# Altium PCB GSMPart.PcbDoc
Units mil, origin at the board's own origin, x right, y up, seen from the top; angles counter-clockwise.
Board outline 6000 x 4000 mil, 2 copper layers (Top Layer, Bottom Layer); 22 components, 17 nets, 114 pads, 0 vias.
Unrouted connection lines stored in the file: 43.
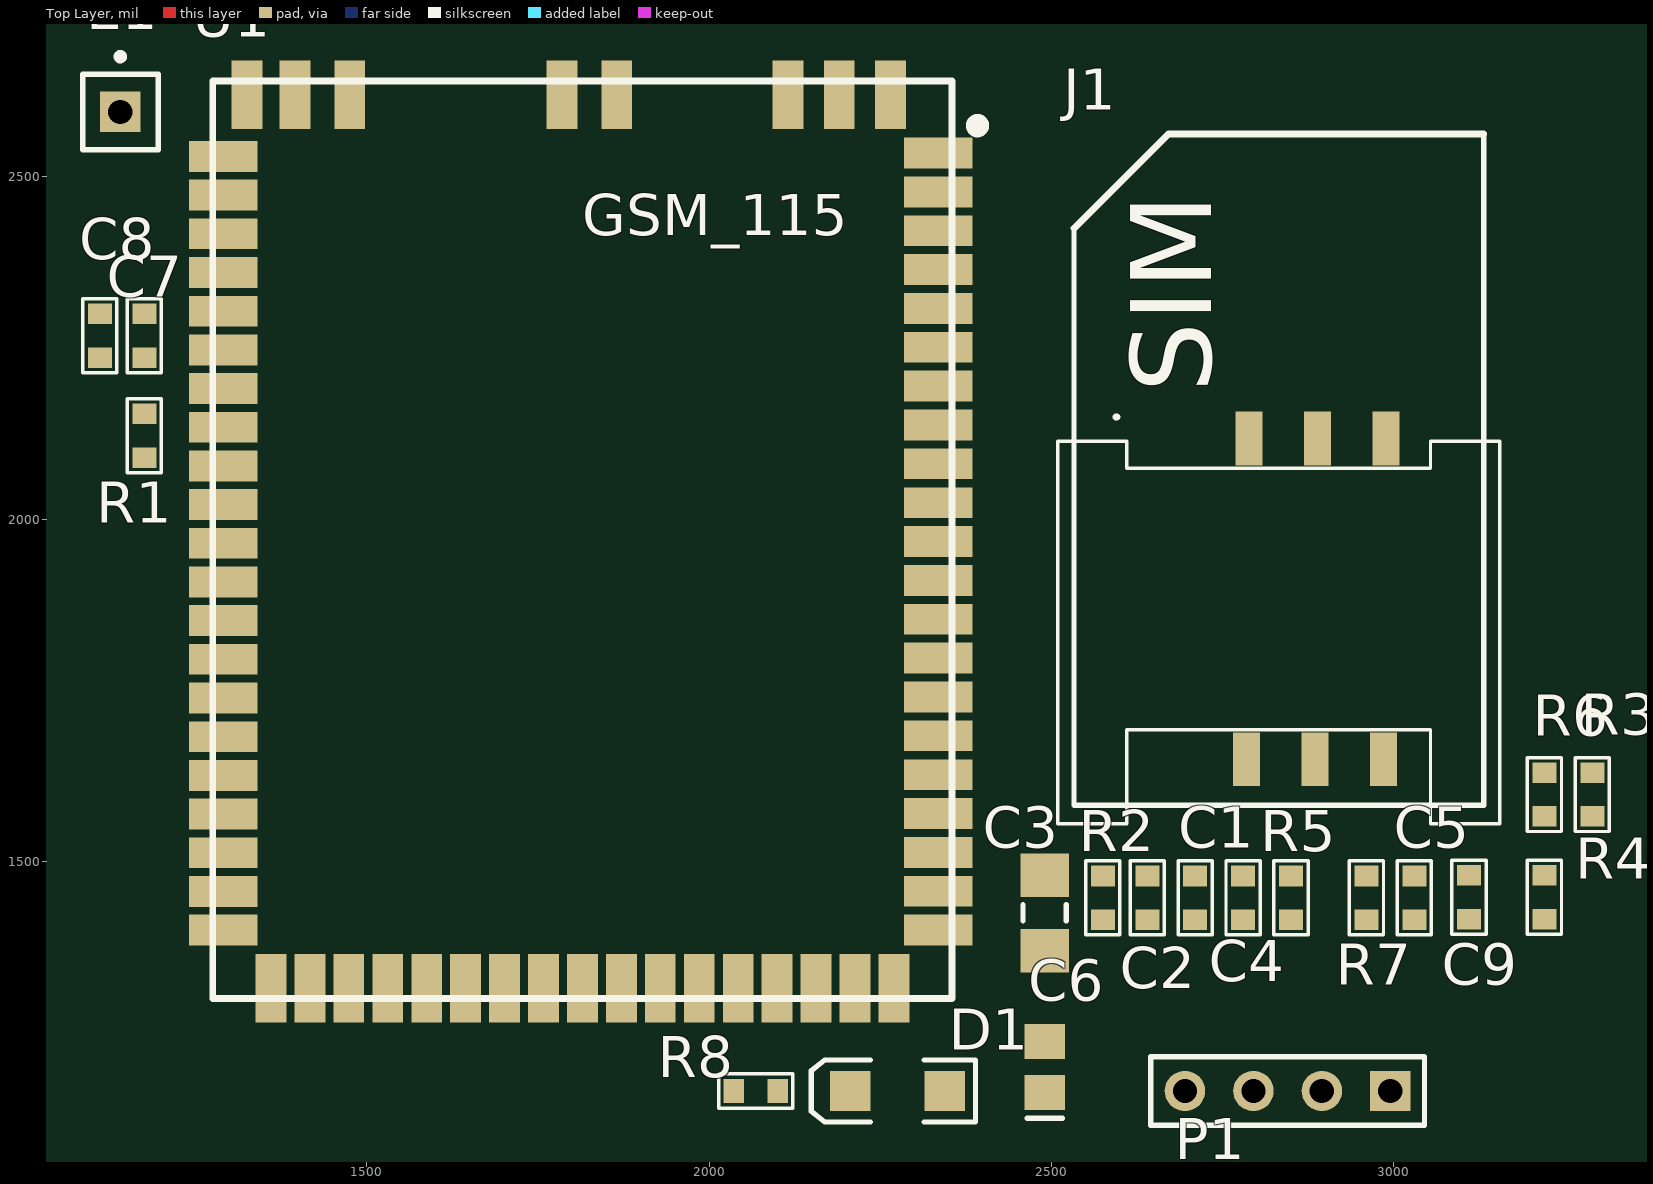
[diagram p0: Top Layer view]
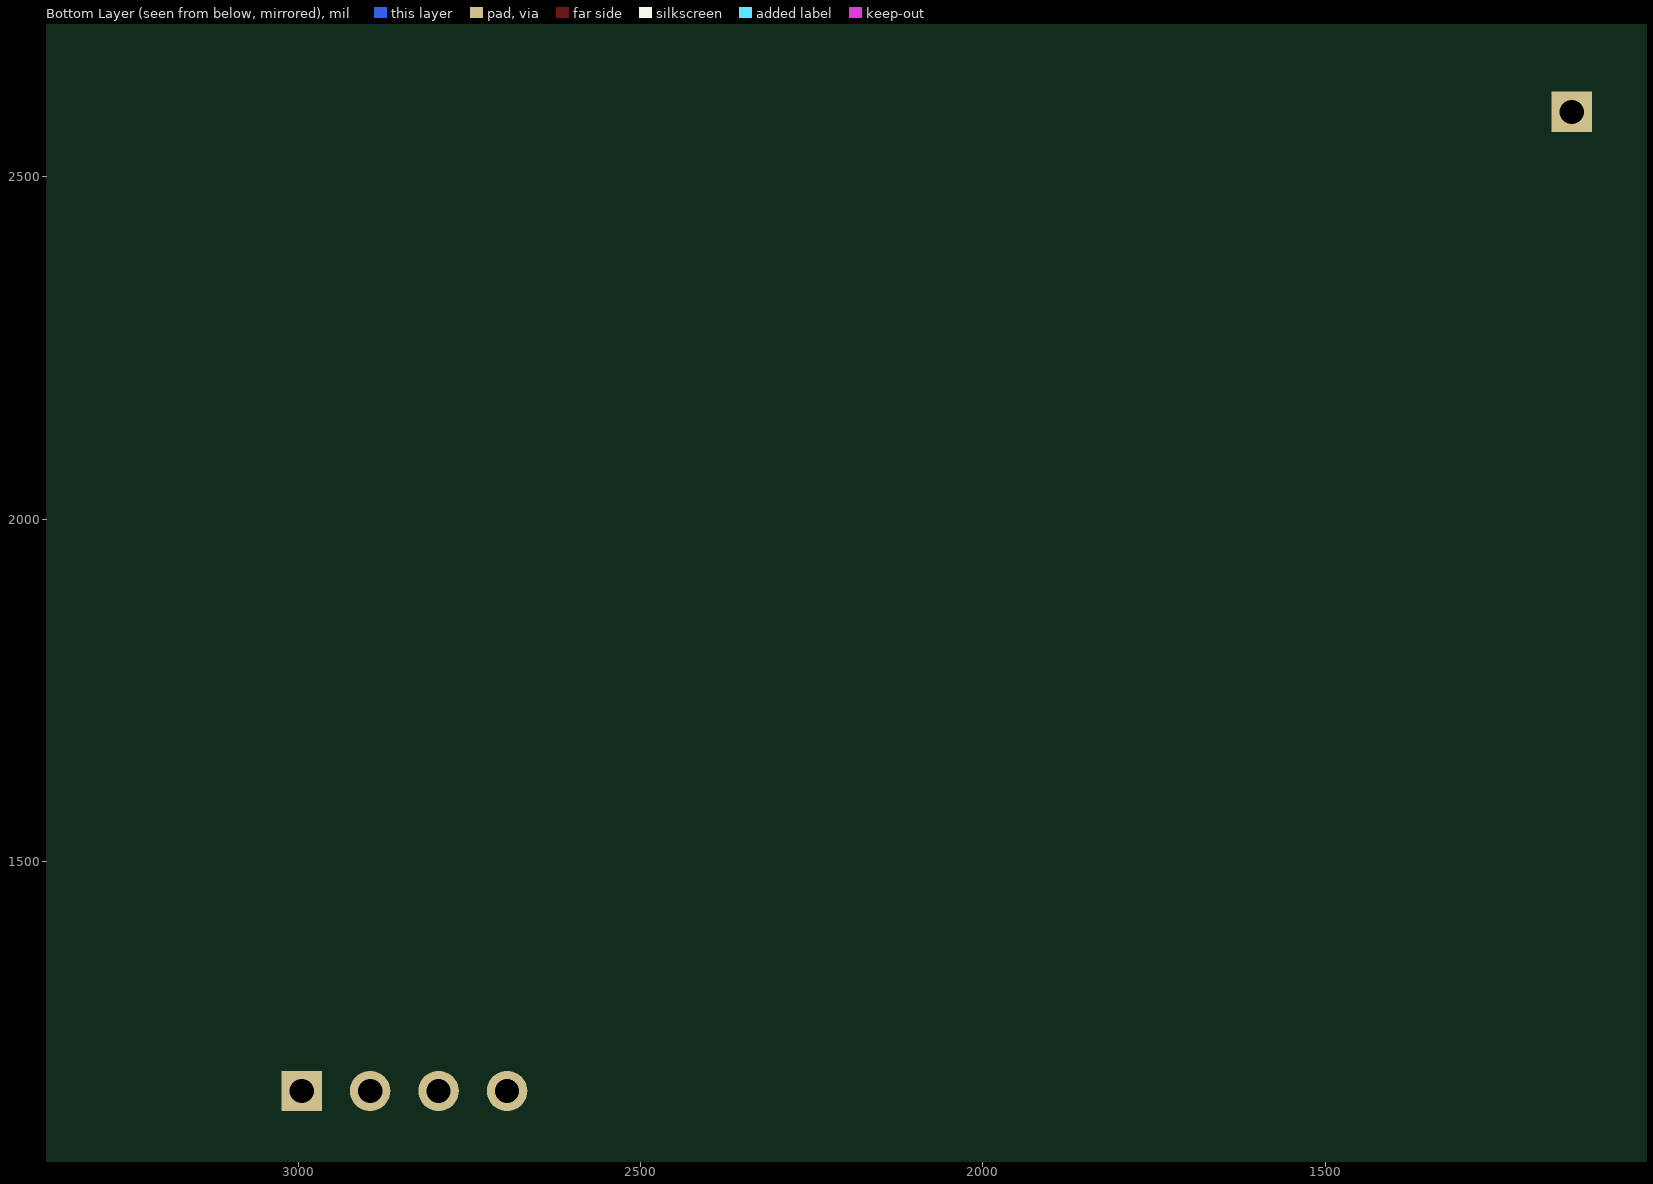
[diagram p1: Bottom Layer view, seen from below]

## Layer stack, top to bottom
Top Layer: signal copper 1.4
Dielectric: dielectric 12.6, FR-4, Dk 4.8
Bottom Layer: signal copper 1.4

## Board outline
1000,1000 7000,1000 7000,5000 1000,5000

## Design rules (kind name [scope] priority, off if disabled: settings)
Clearance [All] p1: gap=10
ComponentClearance [All] p1: gap=10 collisioncheckmode=3 verticalgap=10
PolygonConnect [All] p1: connectstyle=Relief reliefconductorwidth=10 reliefentries=4 polygonreliefangle="90 Angle"
RoutingVias [All] p1: holewidth=28 width=50 viastyle="Through Hole" minholewidth=28 minwidth=50 maxholewidth=28 maxwidth=50
SolderMaskExpansion [All] p1: expansion=4
TestPointUsage [All] p1: valid=0 allowmultiple=FALSE
Testpoint [All] p1: side=15 testpointundercomponent=TRUE minsize=40 maxsize=100 preferedsize=60 minholesize=0 maxholesize=40 preferedholesize=32 testpointgrid=1 style=1023 order=0123456789
Width [All] p1: maxlimit=10 minlimit=10 preferedwidth=10
18 further rules are at their usual default settings.

## Components (designator, comment, footprint, x,y, rotation, side; value= is the part's Value field where it differs from the comment)
C1 "Cap" 1608(0603) 2710,1415 r90 top
C2 "Cap" 1608(0603) 2640,1415 r90 top
C3 "Cap" 3216[1206] 2490,1425 r90 top
C4 "Cap" 1608(0603) 2780,1415 r90 top
C5 "Cap" 1608(0603) 3030,1415 r90 top
C6 "Cap Pol3" C0805 2490,1200 r90 top
C7 "Cap" 1608(0603) 1175,2300 r270 top
C8 "Cap" 1608(0603) 1110,2300 r270 top
C9 "Cap" 1608(0603) 3110,1480 r270 top
D1 "Red LED" 3.2X1.6X1.1 2275,1165 r180 top
E1 "Antenna" PIN1 1140,2595 r0 top
J1 "SIMCard" PCB_SIM 3155,1555 r90 top
P1 "RS232" HDR1X4 2995,1165 r180 top
R1 "Res2" 1608(0603) 1175,2090 r90 top
R2 "Res2" 1608(0603) 2575,1415 r90 top
R3 "Res2" 1608(0603) 3290,1630 r270 top
R4 "Res2" 1608(0603) 3220,1480 r270 top
R5 "Res2" 1608(0603) 2850,1415 r90 top
R6 "Res2" 1608(0603) 3220,1630 r270 top
R7 "Res2" 1608(0603) 2960,1415 r90 top
R8 "Res2" 1608(0603) 2100,1165 r180 top
U1 "GSM_115" PCB_GSM_115 2355,2640 r0 top

## Footprints (in the part's own frame and the unit in brackets; to place one, negate y for a bottom-side part, rotate by r counter-clockwise, add the part's x,y. Pads: shape width x height; smd on the part's side, far side on the other; paste and mask are expansions set on the pad)
3.2X1.6X1.1 [mm] "SMT LED; 2 Flat Leads"
  rect 1.5x1.5 smd: 1(-1.75,0) 2(1.75,0)
  silkscreen extent -2.9,-1.15 3.2,1.15
1608(0603) [mil]
  rect 30x35 smd: 1(0,0) 2(64,0)
  silkscreen extent -22,-25 86,25
3216[1206] [mm] "Chip Resistor; Body 3.2 x 1.6 mm (LxW typ)"
  rect 1.6x1.8 smd: 1(-1.4,0) 2(1.4,0)
  silkscreen extent -0.3,-0.8 0.3,0.8
C0805 [mm] "Chip Capacitor; Body 2.0 x 1.2 mm (LxW typ)"
  rect 1.3x1.5 smd: 1(-0.95,0) 2(0.95,0)
  silkscreen extent -1.9,-0.65 -1.9,0.65
HDR1X4 [mm] "Connector; Header; 4 Position"
  rect 1.5x1.5 hole 0.9: 1(0,0)
  round 1.5 hole 0.9: 2(2.54,0) 3(5.08,0) 4(7.62,0)
  silkscreen extent -1.27,-1.27 8.89,1.27
PCB_GSM_115 [mil]
  rect 100x45 smd: 1(-20,-105) 2(-20,-161.75) 3(-20,-218.5) 4(-20,-275.25) 5(-20,-332) 6(-20,-388.75) 7(-20,-445.5) 8(-20,-502.25) 9(-20,-559) 10(-20,-615.75) 11(-20,-672.5) 12(-20,-729.25) 13(-20,-786) 14(-20,-842.75) 15(-20,-899.5) 16(-20,-956.25) 17(-20,-1013) 18(-20,-1069.75) 19(-20,-1126.5) 20(-20,-1183.25) 21(-20,-1240) 39(-1065,-1240) 40(-1065,-1183.5) 41(-1065,-1127) 42(-1065,-1070.5) 43(-1065,-1014) 44(-1065,-957.5) 45(-1065,-901) 46(-1065,-844.5) 47(-1065,-788) 48(-1065,-731.5) 49(-1065,-675) 50(-1065,-618.5) 51(-1065,-562) 52(-1065,-505.5) 53(-1065,-449) 54(-1065,-392.5) 55(-1065,-336) 56(-1065,-279.5) 57(-1065,-223) 58(-1065,-166.5) 59(-1065,-110)
  rect 45x100 smd: 22(-85,-1325) 23(-141.88,-1325) 24(-198.75,-1325) 25(-255.62,-1325) 26(-312.5,-1325) 27(-369.38,-1325) 28(-426.25,-1325) 29(-483.12,-1325) 30(-540,-1325) 31(-596.88,-1325) 32(-653.75,-1325) 33(-710.62,-1325) 34(-767.5,-1325) 35(-824.38,-1325) 36(-881.25,-1325) 37(-938.12,-1325) 38(-995,-1325) 60(-1030,-20) 61(-960,-20) 62(-880,-20) 63(-570,-20) 64(-490,-20) 65(-240,-20) 66(-165,-20) 67(-90,-20)
  silkscreen extent -1080,-1340 44,0
PCB_SIM [mm]
  rect 2x1 smd: 1(2.4,9.4) 2(2.4,6.86) 3(2.4,4.32) 4(14.3,4.22) 5(14.3,6.76) 6(14.3,9.3)
  silkscreen extent 0,0 25.6,16.4
PIN1 [mm] "Generic Antenna; 1 Lead"
  rect 1.5x1.5 hole 0.9: 1(0,0)
  silkscreen extent -1.4,-1.4 1.4,2.17

## Part data
C1 C2 C3 C4 C5 C7 C8 C9: "Capacitor"
C6: "Polarized Capacitor (Surface Mount)"
D1: library part LED2, "Typical RED, GREEN, YELLOW, AMBER GaAs LED"
E1: "Generic Antenna"
J1: "Sim Card"
P1: library part "Header 4", "Header, 4-Pin"
R1 R2 R3 R4 R5 R6 R7 R8: "Resistor"
U1: library part GSM115

## Nets (pads, with @x,y where several pads share a name; then routed paths per layer and width w, separated by ;. In a path a pad name is that pad's centre, name@x,y a point inside that pad or via, vN(x,y) a via of type N, cw(c..) or ccw(c..) an arc to the next point about the centre after c; other vN are vias at no path point)
GND: C1.1 C2.1 C3.1 C4.1 C5.1 C6.2 C7.1 C8.1 C9.2 J1.4 P1.1 R8.2 U1.9 U1.55 U1.56
NetC1_2: C1.2 C2.2 C3.2 J1.1 R2.2
NetC4_2: C4.2 J1.2 R5.2
NetC5_2: C5.2 J1.3 R7.2
NetC9_1: C9.1 R3.2 R4.1 R6.2
NetD1_2: D1.2 R8.1
NetE1_1: E1.1 U1.60
NetJ1_5: J1.5 R3.1
NetJ1_6: J1.6 R6.1
NetP1_2: P1.2 U1.35
NetP1_3: P1.3 U1.36
SIM_CLK: R7.1 U1.25
SIM_IO: R4.2 U1.27
SIM_RST: R5.1 U1.26
VBAT: C7.2 C8.2 R1.2 U1.53 U1.54
VCC: C6.1 D1.1 P1.4 R1.1 U1.22
VSIM: R2.1 U1.28
pads on no net: U1.1 U1.2 U1.3 U1.4 U1.5 U1.6 U1.7 U1.8 U1.10 U1.11 U1.12 U1.13 U1.14 U1.15 U1.16 U1.17 U1.18 U1.19 U1.20 U1.21 U1.23 U1.24 U1.29 U1.30 U1.31 U1.32 U1.33 U1.34 U1.37 U1.38 U1.39 U1.40 U1.41 U1.42 U1.43 U1.44 U1.45 U1.46 U1.47 U1.48 U1.49 U1.50 U1.51 U1.52 U1.57 U1.58 U1.59 U1.61 U1.62 U1.63 U1.64 U1.65 U1.66 U1.67

## Text inside footprints (layer, text, board x,y; h text height)
J1: Top Overlay "SIM" at 2733.74,2184.92 h118.11 r90